# Altium PCB PCB_Step.PcbDoc
Units mm, origin at the board's own origin, x right, y up, seen from the top; angles counter-clockwise.
Board outline 39.75 x 39.5 mm, 2 copper layers (Top Layer, Bottom Layer); 50 components, 50 nets, 210 pads, 84 vias.
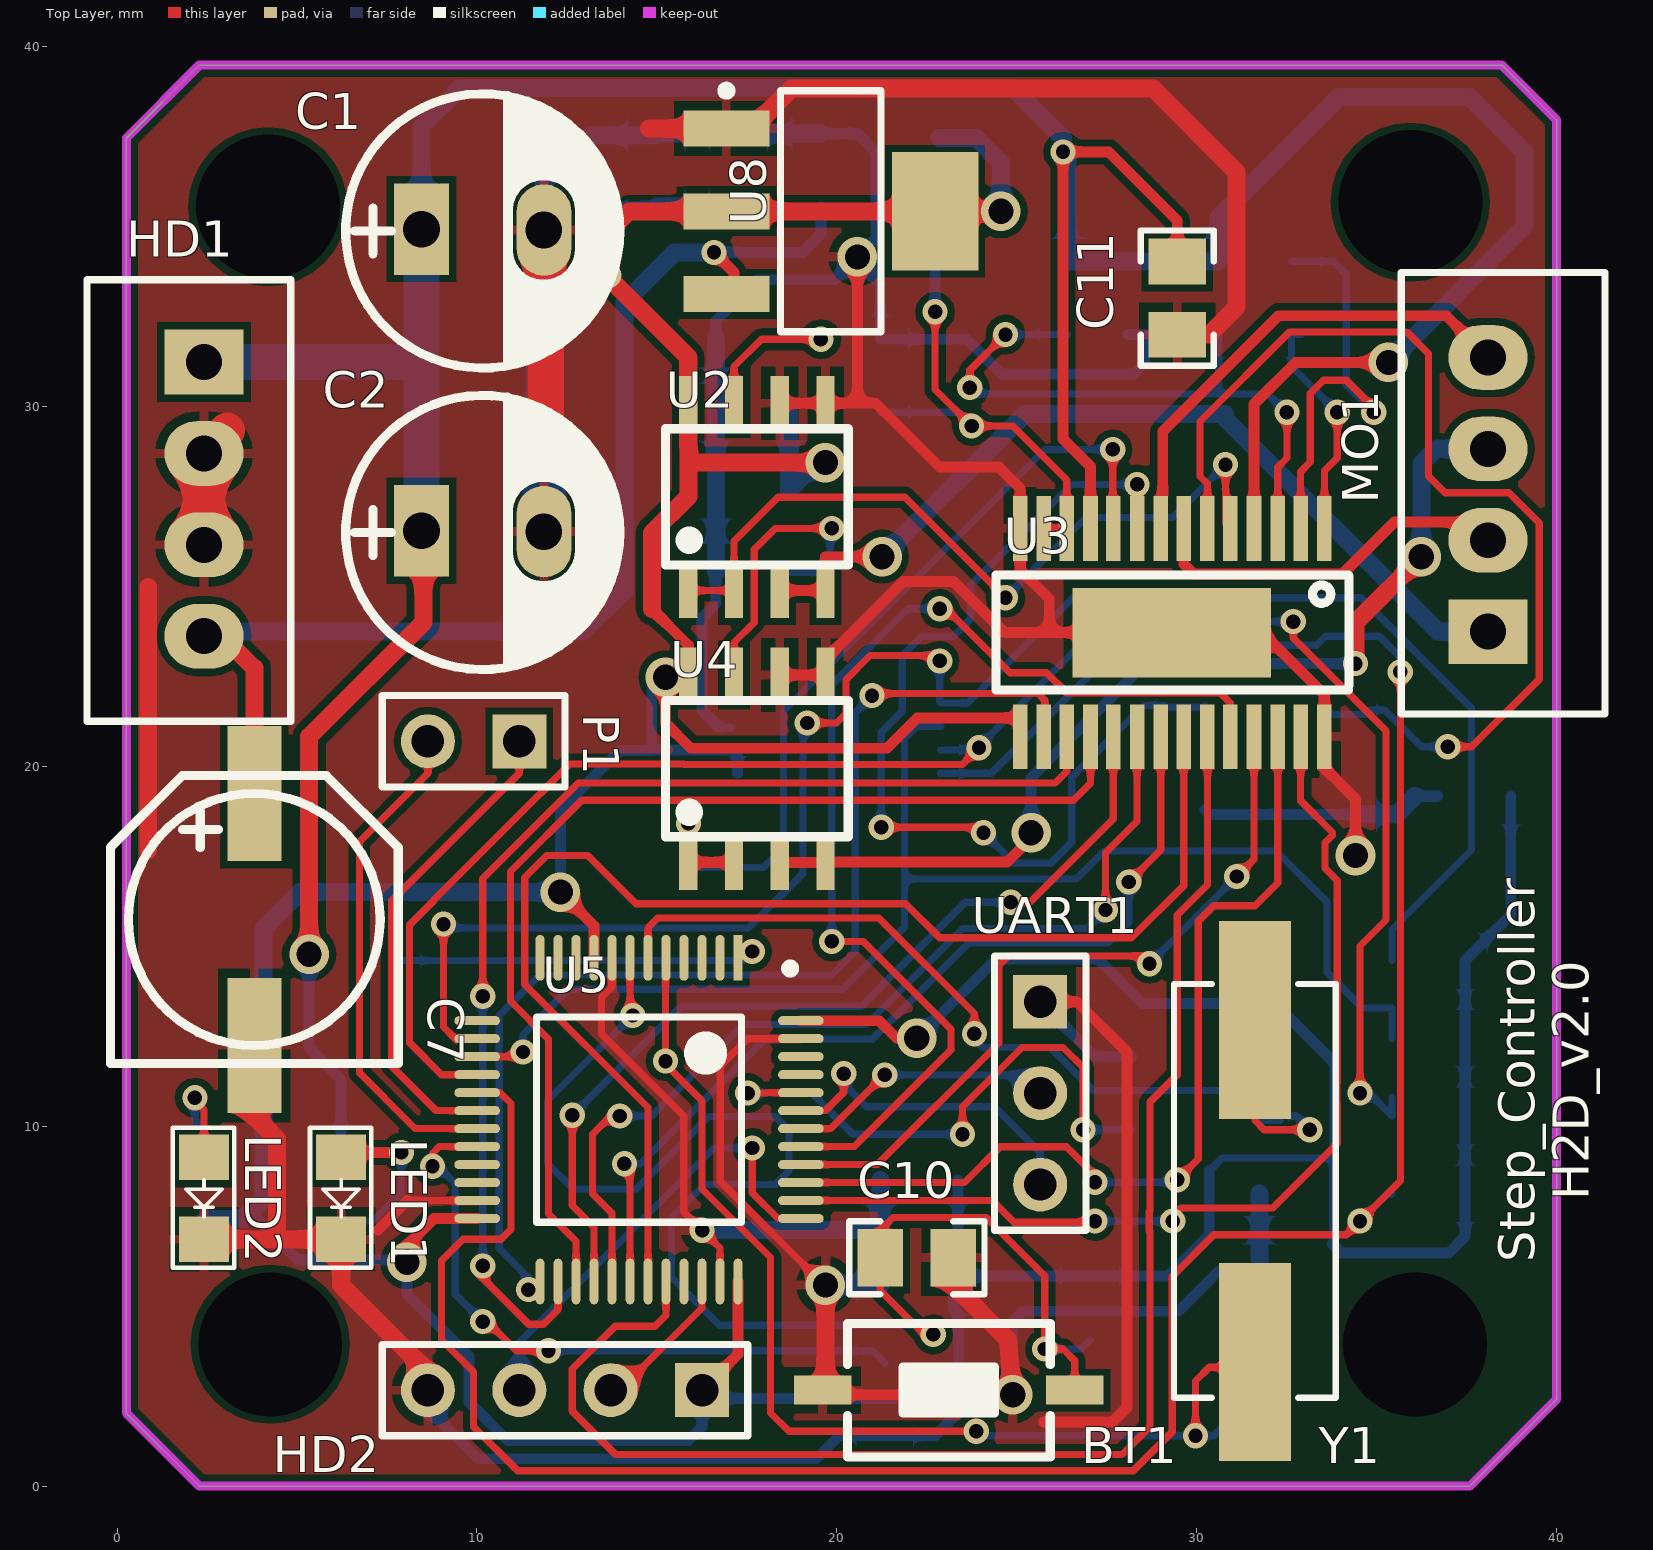
[diagram p0: Top Layer view]
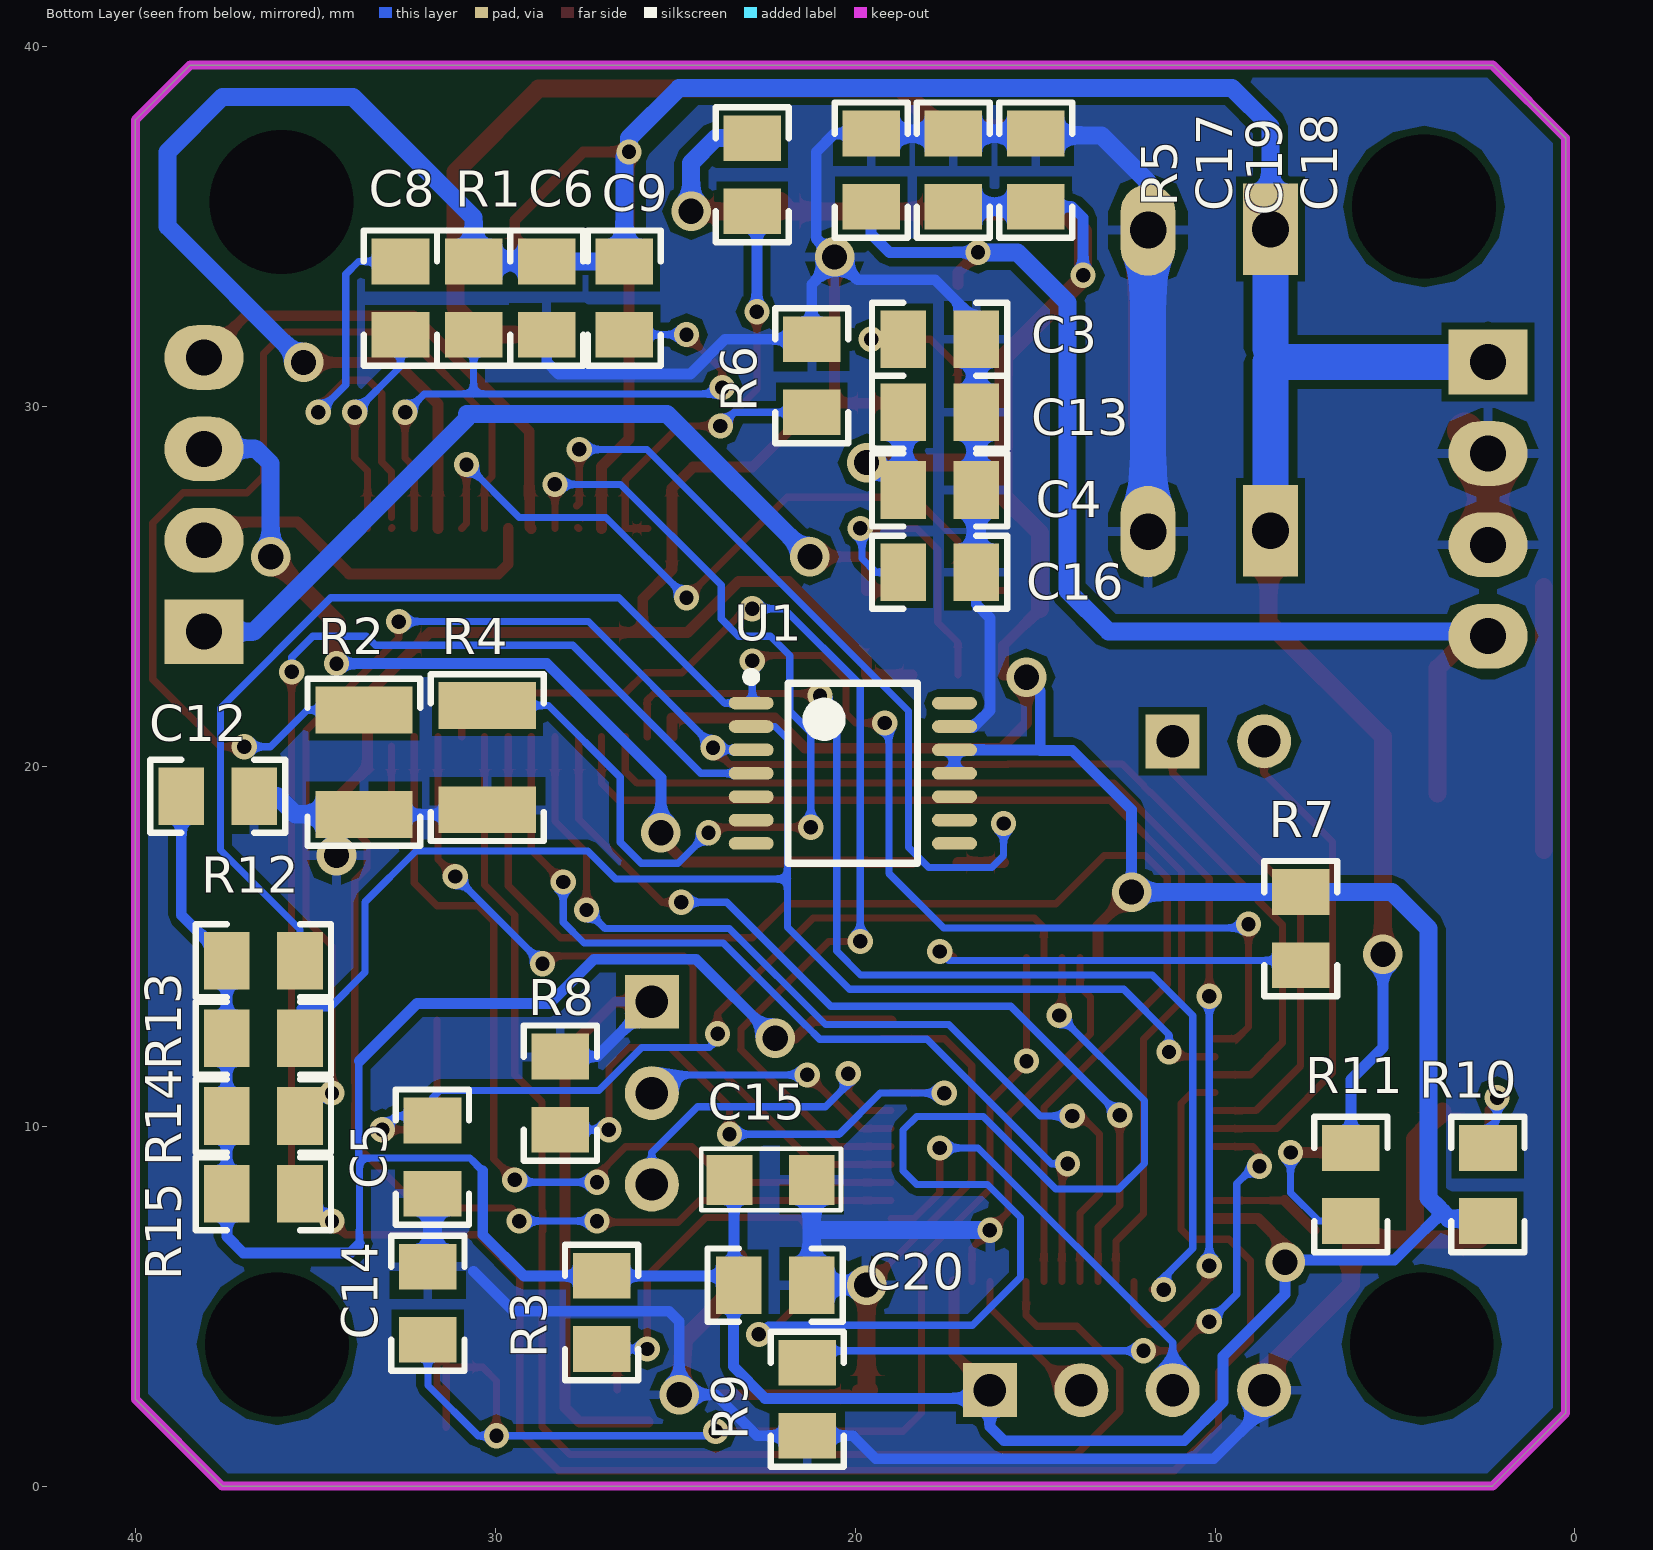
[diagram p1: Bottom Layer view, seen from below]
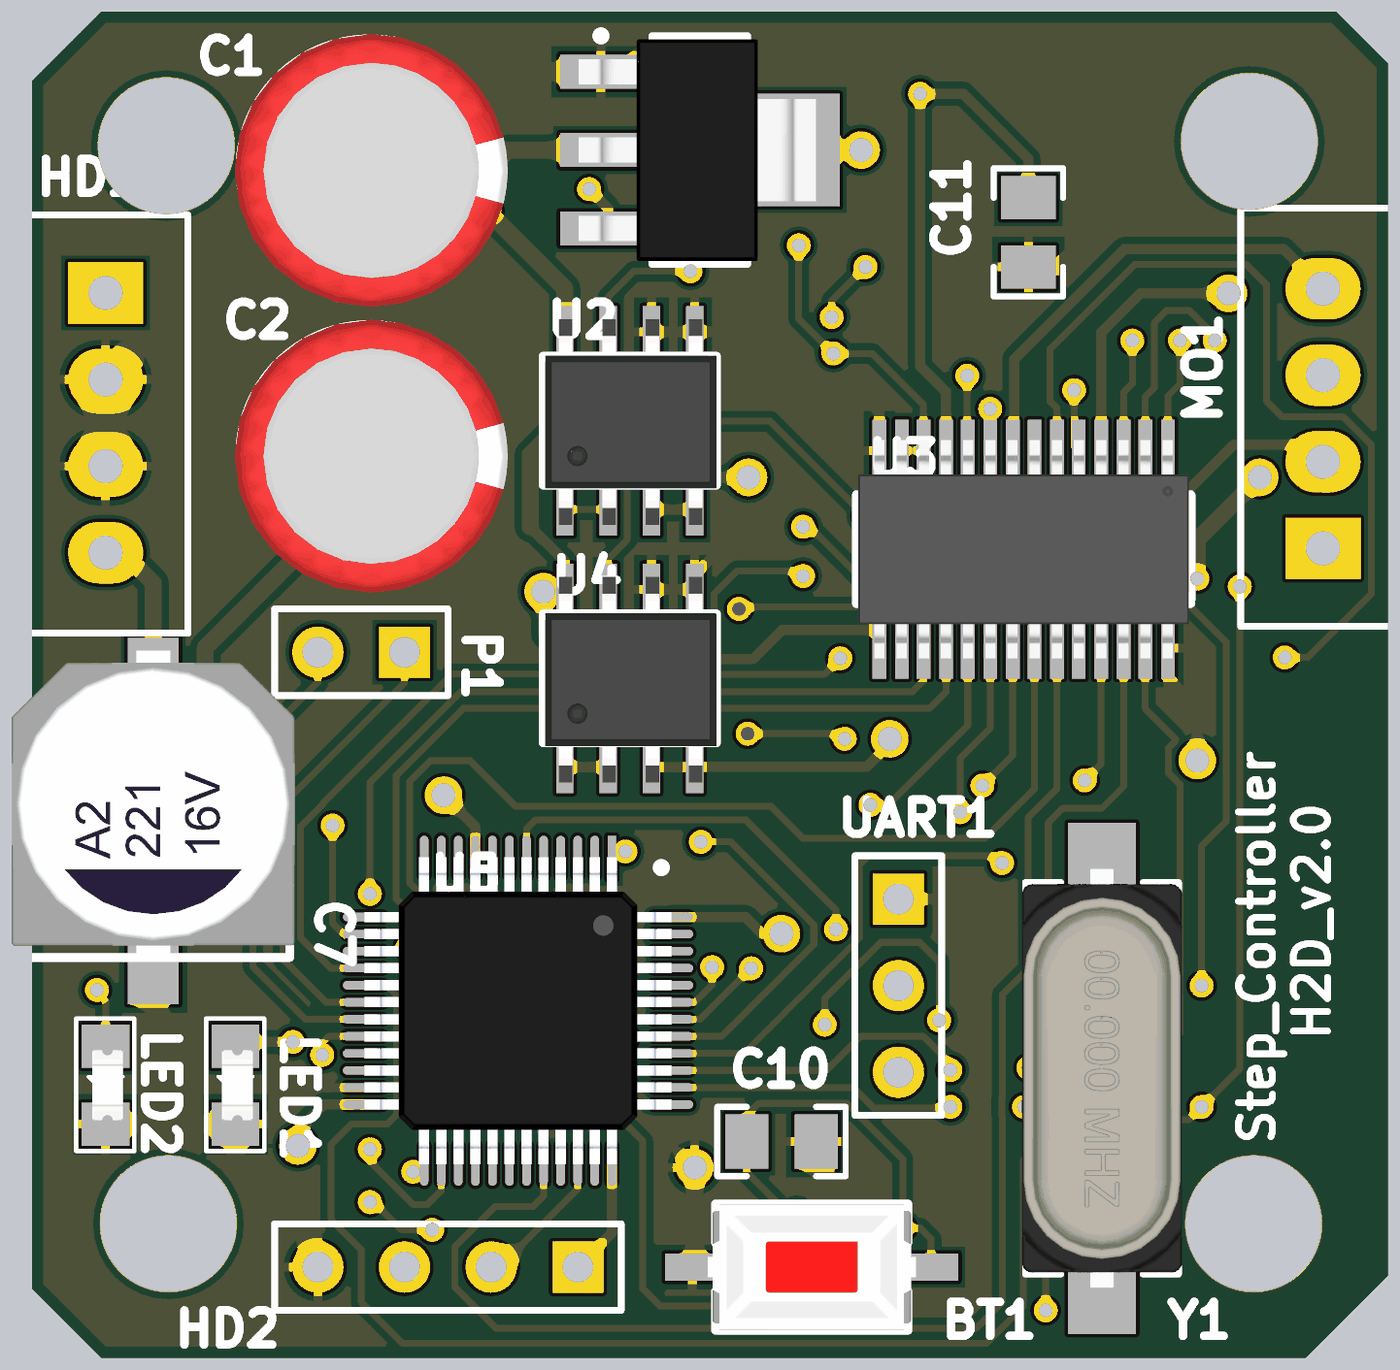
[diagram p2: 3D render of the assembled board from above, using the file's embedded part models]

## Layer stack, top to bottom
Top Solder: solder mask 0.0102, Solder Resist, Dk 3.5
Top Layer: signal copper 0.0356
Dielectric 1: dielectric 0.32, FR-4, Dk 4.8
Bottom Layer: signal copper 0.0356
Bottom Solder: solder mask 0.0102, Solder Resist, Dk 3.5

## Board outline
0.254,2.032 2.286,0 37.592,0 40.005,2.413 40.005,37.973 38.481,39.497 2.286,39.497 0.254,37.465

## Design rules (kind name [scope] priority, off if disabled: settings)
Clearance [All] p1: gap=0.2
PolygonConnect [All] p1: connectstyle=Relief reliefconductorwidth=0.254 reliefentries=4 polygonreliefangle="90 Angle" airgapwidth=0.254
RoutingVias RoutingVias_Power [InNetClass('Power_Class')] p1: holewidth=0.7 width=1.1 viastyle="Through Hole" minholewidth=0.7 minwidth=1.1 maxholewidth=0.7 maxwidth=1.1
RoutingVias RoutingVias_Signal [All] p2: holewidth=0.4 width=0.7 viastyle="Through Hole" minholewidth=0.4 minwidth=0.7 maxholewidth=0.4 maxwidth=0.7
SolderMaskExpansion [All] p1: expansion=0.102
Width Width_Power [InNetClass('Power_Class')] p1: maxlimit=1 minlimit=0.3 preferedwidth=0.5
Width Width_Signal [All] p2: maxlimit=0.2 minlimit=0.2 preferedwidth=0.2
30 further rules are at their usual default settings.

## Classes and differential pairs
net class Power_Class: 3.3V 5V VCC_MO

## Components (designator, comment, footprint, x,y, rotation, side; value= is the part's Value field where it differs from the comment)
BT1 "BUTTON 4P SMD_MH" "BUTTON 2P SMD" 23.114,2.667 r0 top
C1 "390uF" CP1/3.0 10.16,34.925 r0 top
C2 "390uF" CP1/3.0 10.16,26.543 r0 top
C3 "104" 0805_HV 17.653,31.877 r0 bottom
C4 "104" 0805_HV 17.653,27.686 r0 bottom
C5 "22P" 0805_HV 31.75,9.144 r90 bottom
C6 "103" 0805_HV 28.575,33.02 r90 bottom
C7 "330uF" TU_NHOM_220uF_25V_MH 3.81,15.748 r180 top
C8 "103" 0805_HV 32.639,33.02 r270 bottom
C9 "0.1uF" 0805_HV 26.416,33.02 r90 bottom
C10 "104" 0805_HV 22.225,6.35 r180 top
C11 "103" 0805_HV 29.464,33.02 r90 top
C12 "0.47uF" 0805_HV 37.719,19.177 r0 bottom
C13 "104" 0805_HV 17.653,29.845 r0 bottom
C14 "22P" 0805_HV 31.877,5.08 r270 bottom
C15 "104" TU_SMD_0805 22.352,8.509 r0 bottom
C16 "104" 0805_HV 17.653,25.4 r0 bottom
C17 "105" 0805_HV 19.558,36.576 r270 bottom
C18 "105" 0805_HV 14.986,36.576 r270 bottom
C19 "105" 0805_HV 17.272,36.576 r270 bottom
C20 "104" 0805_HV 22.225,5.588 r0 bottom
HD1 "Header 4 Cong_MH" "HEADER 4" 2.413,27.432 r270 top
HD2 "SWD" HDR1X4 16.256,2.667 r180 top
LED1 "Led nguon" LED_0805 2.413,8.001 r270 top
LED2 "Led nguon" LED_0805 6.223,8.001 r270 top
MO1 "Header 4_MH" "HEADER 4" 38.1,27.559 r90 top
P1 "Header 2" HDR1X2 11.176,20.701 r180 top
R1 "1M" 0805_HV 30.607,33.02 r90 bottom
R2 "RT0603DRE07140KL" 1210 33.655,20.119 r270 bottom
R3 "10K" 0805_HV 27.051,4.826 r90 bottom
R4 "RT0603DRE07140KL" 1210 30.226,20.246 r270 bottom
R5 "50K" 0805_HV 22.86,36.449 r90 bottom
R6 "30K" 0805_HV 21.209,30.861 r270 bottom
R7 "0R" 0805_HV 7.62,15.494 r90 bottom
R8 "100K" 0805_HV 28.194,10.922 r270 bottom
R9 "100K" 0805_HV 21.336,2.413 r270 bottom
R10 "330" 0805_HV 2.413,8.382 r270 bottom
R11 "1M" 0805_HV 6.223,8.382 r90 bottom
R12 "4.7K" 0805_HV 36.449,14.605 r0 bottom
R13 "4.7K" 0805_HV 36.449,12.446 r0 bottom
R14 "4.7K" 0805_HV 36.449,10.287 r0 bottom
R15 "4.7K" 0805_HV 36.449,8.128 r0 bottom
U1 "AS5047D" TSSOP14 20.066,19.812 r180 bottom
U2 "ACS722LLCTR-05AB-T" "SOP 8" 17.78,27.495 r0 top
U3 "DRV8841PWPR" TSSOP-28EP 29.324,23.724 r270 top
U4 "ACS722LLCTR-05AB-T" "SOP 8" 17.78,19.939 r0 top
U5 "STM32F103C8T6 LQFP48 _MH" LQFP48 14.478,10.16 r270 top
U8 "AMS1117-3.3V SOT223 _MH" SOT223 19.833,35.433 r270 top
UART1 "Header 3_MH" HDR1X3 25.654,13.462 r270 top
Y1 "8MHZ" "XTAL 49S SMD" 31.623,8.204 r270 top

## Footprints (in the part's own frame and the unit in brackets; to place one, negate y for a bottom-side part, rotate by r counter-clockwise, add the part's x,y. Pads: shape width x height; smd on the part's side, far side on the other; paste and mask are expansions set on the pad)
0805_HV [mil] "0805 with 30mil clearance between pads"
  rect 50x63 smd: 1(-40,0) 2(40,0)
  silkscreen extent -74,-40 74,40, body extent -43,-29 43,29, height 57
1210 [mm] "1210 from SM-752 data"
  rect 1.3x2.7 smd: 1(1.45,0) 2(-1.45,0)
  silkscreen extent -2.32,-1.57 2.32,1.57, body extent -1.7,-1.35 1.7,1.35, height 1.35
"BUTTON 2P SMD" [mm]
  rect 1.6x0.8 smd: 1(-3.5,0) 2(3.5,0)
  silkscreen extent -2.82,-1.85 2.82,1.85, body extent -3.05,-1.85 3.05,1.85, height 2.5
CP1/3.0 [mil]
  rect 60x100 hole 40: 1(-67,0.5)
  oval 60x100 hole 40: 2(67,-0.5)
  silkscreen extent -150,-151 150,148, body extent -156,-161 159,154, height 453
HDR1X2 [mm] "Connector; Header; 2 Position"
  rect 1.5x1.5 hole 0.9: 1(0,0)
  round 1.5 hole 0.9: 2(2.54,0)
  silkscreen extent -1.27,-1.27 3.81,1.27
HDR1X3 [mm] "Connector; Header; 3 Position"
  rect 1.5x1.5 hole 0.9: 1(0,0)
  round 1.5 hole 0.9: 2(2.54,0) 3(5.08,0)
  silkscreen extent -1.27,-1.27 6.35,1.27
HDR1X4 [mm] "Connector; Header; 4 Position"
  rect 1.5x1.5 hole 0.9: 1(0,0)
  round 1.5 hole 0.9: 2(2.54,0) 3(5.08,0) 4(7.62,0)
  silkscreen extent -1.27,-1.27 8.89,1.27
"HEADER 4" [mm]
  rect 1.8x2.2 hole 1: 1(-3.81,0)
  oval 1.8x2.2 hole 1: 2(-1.27,0) 3(1.27,0) 4(3.81,0)
  silkscreen extent -6.1,-3.25 6.17,2.41
LED_0805 [mil]
  rect 50x55 smd: 1(-45,0) 2(45,0)
  silkscreen extent -77,-34 76,33, body extent -41,-16 41,20, height 33
LQFP48 [mm]
  rect 1.27x0.25 smd: 1(-4.524,2.775)
  oval 1.27x0.25 smd: 2(-4.524,2.275) 3(-4.524,1.775) 4(-4.524,1.275) 5(-4.524,0.775) 6(-4.524,0.275) 7(-4.524,-0.225) 8(-4.524,-0.725) 9(-4.524,-1.225) 10(-4.524,-1.725) 11(-4.524,-2.225) 12(-4.524,-2.725) 25(4.473,-2.725) 26(4.473,-2.225) 27(4.473,-1.725) 28(4.473,-1.225) 29(4.473,-0.725) 30(4.473,-0.225) 31(4.473,0.275) 32(4.473,0.775) 33(4.473,1.275) 34(4.473,1.775) 35(4.473,2.275) 36(4.473,2.775)
  oval 0.25x1.27 smd: 13(-2.775,-4.473) 14(-2.275,-4.473) 15(-1.775,-4.473) 16(-1.275,-4.473) 17(-0.775,-4.473) 18(-0.275,-4.473) 19(0.225,-4.473) 20(0.725,-4.473) 21(1.225,-4.473) 22(1.725,-4.473) 23(2.225,-4.473) 24(2.725,-4.473) 37(2.725,4.524) 38(2.225,4.524) 39(1.725,4.524) 40(1.225,4.524) 41(0.725,4.524) 42(0.225,4.524) 43(-0.275,4.524) 44(-0.775,4.524) 45(-1.275,4.524) 46(-1.775,4.524) 47(-2.275,4.524) 48(-2.775,4.524)
  silkscreen extent -4.35,-2.82 2.82,4.35, body extent -4.53,-4.47 4.47,4.53, height 1.5
"SOP 8" [mil] "LQFP64"
  rect 20x60 smd: 1(-75,-102.5) 2(-25,-102.5) 3(25,-102.5) 4(75,-102.5) 5(75,102.5) 6(25,102.5) 7(-25,102.5) 8(-75,102.5)
  silkscreen extent -100,-74 100,74, body extent -98,-120 100,117, height 63
SOT223 [mm]
  rect 1x2.4 smd: 1(-2.3,-2.9) 2(0,-2.9) 3(2.3,-2.9)
  rect 3.3x2.4 smd: 4(0,2.9)
  silkscreen extent -3.47,-3.02 3.35,1.4, body extent -3.25,-3.56 3.25,3.4, height 1.68
TSSOP14 [mm] "TSSOP, 14-Leads, Body 5.00x4.40mm, Pitch 0.65mm, IPC High Density"
  oval 1.25x0.35 smd: 1(-2.825,1.95) 2(-2.825,1.3) 3(-2.825,0.65) 4(-2.825,0) 5(-2.825,-0.65) 6(-2.825,-1.3) 7(-2.825,-1.95) 8(2.825,-1.95) 9(2.825,-1.3) 10(2.825,-0.65) 11(2.825,0) 12(2.825,0.65) 13(2.825,1.3) 14(2.825,1.95)
  silkscreen extent -2.95,-2.5 1.8,2.8, body extent -3.23,-2.55 3.23,2.55, height 1.25
TSSOP-28EP [mil]
  rect 71x16 smd: 1(-114,166.5) 2(-114,140.5) 3(-114,115.5) 4(-114,89.5) 5(-114,63.5) 6(-114,38.5) 7(-114,12.5) 8(-114,-12.5) 9(-114,-38.5) 10(-114,-64.5) 11(-114,-89.5) 12(-114,-115.5) 13(-114,-140.5) 14(-114,-166.5) 15(114,-166.5) 16(114,-140.5) 17(114,-115.5) 18(114,-89.5) 19(114,-64.5) 20(114,-38.5) 21(114,-12.5) 22(114,12.5) 23(114,38.5) 24(114,63.5) 25(114,89.5) 26(114,115.5) 27(114,140.5) 28(114,166.5)
  rect 98x217 smd: 29(0,-0.5)
  silkscreen extent -63,-193 63,194, body extent -126,-191 126,191, height 46
TU_NHOM_220uF_25V_MH [mm]
  rect 1.5x3.75 smd: 1(0,-3.5) 2(0,3.5)
  silkscreen extent -4,-4 4,4, body extent -4.15,-5 4.15,4, height 11.23
TU_SMD_0805 [mil]
  rect 50x55 smd: 1(-45,0) 2(45,0)
  silkscreen extent -77,-34 76,33, body extent -40,-27 40,23, height 24
"XTAL 49S SMD" [mm]
  rect 5.5x2 smd: 1(-4.75,0) 2(4.75,0)
  silkscreen extent -5.75,-2.25 5.75,2.25, body extent -6.15,-2.35 6.15,2.35, height 4.31

## Part data
BT1: "Nút nh?n 4 chân, dán"
C1 C2: library part "Capacitor TuHoa"
C3 C4 C6 C8 C9 C10 C11 C12 C13 C16 C20: library part "Capacitor 0805", "Ceramic Chip Capacitor - Standard"
C5 C14 C17 C18 C19: library part CM, "Cap SMD"
C7: library part TU_NHOM_330uF_16V_MH, "TU_NHOM_330uF_16V_MH"
C15: library part TU_SMD_0805_MH
HD1: "Header 4P XH2.54 cong"
HD2: library part "Header 4_MH", "Header 4P XH2.54 th?ng"
LED1 LED2: library part "LED SMD_0805_MH", "LED 3mm"
MO1: "Header 4P XH2.54 th?ng"
P1: "Header, 2-Pin"
R1 R3 R5 R6 R7 R8 R9 R10 R11 R12 R13 R14 R15: library part "R nho", "RES, 100, 1%, 0.1 W, 0402"
R2 R4: "RES, 140 k, 0.5%, 0.1 W, 0603"
U2 U4: library part ACS712
UART1: "Header 3P XH2.54 th?ng"
Y1: library part "CRYSTAL_49S DIP_MH", "Crystal Oscillator"

## Free pads (board coordinates)
  round 1.524 hole 4: 0(4.191,35.56) 0(4.254,3.937) 0(35.941,35.687) 0(36.068,3.937)

## Via types
v1: diameter 0.7, hole 0.4, Top Layer to Bottom Layer, 69 vias
v2: diameter 1.1, hole 0.7, Top Layer to Bottom Layer, 15 vias

## Nets (pads, with @x,y where several pads share a name; then routed paths per layer and width w, separated by ;. In a path a pad name is that pad's centre, name@x,y a point inside that pad or via, vN(x,y) a via of type N, cw(c..) or ccw(c..) an arc to the next point about the centre after c; other vN are vias at no path point)
3.3V: C4.2 C12.2 C13.2 C15.2 C18.2 C19.2 C20.2 HD2.1 R3.2 R5.2 R7.2 R10.2 R12.2 R13.2 R14.2 R15.2 U1.11 U1.12 U2.8 U3.15 U4.8 U5.9 U5.24 U5.36 U5.48 U8.2 U8.4 | length 174.8
  Top Layer w0.3: v2(8.052,6.223) 8.052,6.68 8.807,7.435 U5.24 ; v2(12.319,16.51) 13.253,15.576 U5.9 ; 14.859,24.384 15.875,23.368 U4.8 15.303,22.543 v2(15.24,22.479) 15.24,21.209 15.94,20.509 21.398,20.509 22.239,21.35 25.095,21.35 U3.15 ; HD2.1 17.253,3.664 U5.36 ; U5.48 21.177,12.935 21.666,12.446 v2(22.225,12.446)
  Top Layer w0.5: 14.859,24.384 14.859,26.492 15.875,27.508 15.875,28.575 ; v2(19.685,28.448) 16.002,28.448 15.875,28.575 ; v2(24.562,35.433) U8.4 22.082,35.433 22.082,35.72 21.795,35.433 U8.2 14.224,35.433 13.665,34.874 v1(13.665,33.655) 13.665,33.579 15.875,31.369 U2.8 15.875,28.575
  Bottom Layer w0.2: 30.353,8.763 30.709,9.119 33.782,9.119 ; 33.782,6.731 33.782,9.119 ; 33.782,11.814 33.797,11.799 33.797,9.134 33.782,9.119
  Bottom Layer w0.3: 3.683,7.62 5.016,6.287 7.988,6.287 v2(8.052,6.223) 8.052,5.334 9.779,3.607 9.779,2.337 10.854,1.262 15.867,1.262 16.256,1.651 HD2.1 16.485,2.438 22.504,2.438 23.386,3.32 23.386,4.793 23.241,4.938 C20.2 C20.2@23.368,5.715 ; v2(12.319,16.51) 12.319,18.796 13.97,20.447 14.859,20.447 14.859,20.462 ; v2@12.556,16.366 v2@12.7,16.51 ; v1(13.665,33.655) 13.665,35.255 13.97,35.56 C18.2 ; v2(15.24,22.479) 14.859,22.098 14.859,20.462 ; U1.11 U1.12 14.859,20.462 ; v2(22.225,12.446) 24.423,14.644 27.259,14.644 28.489,13.414 32.182,13.414 33.782,11.814 ; C20.2@23.368,5.232 C20.2@23.368,5.715 ; C15.2@23.368,8.509 23.368,5.842 C20.2@23.368,5.715 ; C20.2@23.52,5.842 R3.2 29.21,5.842 30.353,6.985 30.353,8.763 ; 33.782,6.731 34.036,6.477 37.008,6.477 37.465,6.934 R15.2 R14.2 R13.2 R12.2 38.735,15.875 C12.2
  Bottom Layer w0.5: R10.2 2.476,7.429 3.492,7.429 3.683,7.62 ; 3.778,7.715 4.064,8.001 4.064,15.494 5.08,16.51 R7.2 v2(12.319,16.51) ; C18.2 C19.2 ; C13.2 C4.2 19.431,28.448 v2(19.685,28.448) ; R5.2 23.876,37.465 24.562,36.779 v2(24.562,35.433) ; C20.2@23.368,5.842 23.444,5.69 C20.2@23.52,5.842
5V: C7.1 C17.2 HD1.4 U8.3 | length 34
  Top Layer w0.3: v1(16.586,34.29) 17.145,33.731 U8.3@17.145,33.401
  Top Layer w0.5: HD1.4@2.413,24.003 HD1.4 2.921,23.622 3.81,22.733 C7.1
  Bottom Layer w0.3: v1(16.586,34.29) 19.05,34.29 19.558,34.798 C17.2
  Bottom Layer w0.5: HD1.4@2.413,24.003 2.667,23.749 12.954,23.749 14.097,24.892 14.097,32.893 15.494,34.29 v1(16.586,34.29)
AI0: U3.24 U5.41 | length 31.3
  Top Layer w0.2: U5.41 20.484,9.435 23.188,12.139 23.175,12.151 23.175,12.698 20.735,15.138 v1(19.863,15.138) ; v1(22.86,24.384) 22.987,24.384 23.012,24.409 24.816,22.606 25.832,22.606 26.391,22.047 30.658,22.047 30.937,21.768 U3.24
  Bottom Layer w0.2: v1(19.863,15.138) 19.863,22.27 21.977,24.384 v1(22.86,24.384)
AI1: U3.25 U5.40 | length 21
  Top Layer w0.2: U5.40 21.127,8.935 24.511,12.319 24.511,14.478 24.765,14.732 28.482,14.732 v1(28.693,14.52) ; v1(31.115,16.942) 31.598,17.424 U3.25
  Bottom Layer w0.2: v1(28.693,14.52) v1(31.115,16.942)
BI1: U3.26 U5.39 | length 25.6
  Top Layer w0.2: U5.39 23.548,8.435 24.545,9.432 26.382,9.432 27.178,8.636 v1(27.178,8.445) ; v1(29.464,8.509) 30.048,9.093 30.048,15.697 30.48,16.129 31.623,16.129 32.258,16.764 U3.26
  Bottom Layer w0.2: v1(27.178,8.445) 29.4,8.445 v1(29.464,8.509)
BI2: U3.27 U5.38 | length 27.8
  Top Layer w0.2: U5.38 24.323,7.935 24.926,7.332 27.144,7.332 v1(27.178,7.366) ; v1(29.337,7.366) 29.337,7.493 29.576,7.732 32.116,7.732 33.909,9.525 33.909,10.638 33.894,10.653 33.894,11.191 33.909,11.206 33.909,16.832 33.567,17.174 33.567,17.88 33.777,18.089 33.777,18.166 32.893,19.05 U3.27@32.893,20.574
  Bottom Layer w0.2: v1(27.178,7.366) v1(29.337,7.366)
BOOT0: R8.2 U5.44 | length 16
  Top Layer w0.2: v1(17.526,10.922) 18.058,10.922 18.071,10.935 U5.44 ; v1(23.495,9.779) 23.495,10.541 25.146,12.192 26.289,12.192 26.848,11.633 v1(26.848,9.906)
  Bottom Layer w0.2: v1(17.526,10.922) 19.304,10.922 20.447,9.779 v1(23.495,9.779) ; v1(26.848,9.906) R8.2
BOOT1: R9.1 U5.20 | length 18.3
  Top Layer w0.2: v1(8.763,8.89) 8.763,9.246 8.953,9.435 U5.20 ; v1(10.16,4.572) 10.287,4.572 11.1,3.759 v1(11.989,3.759)
  Bottom Layer w0.2: v1(8.763,8.89) 8.915,8.89 9.398,8.407 9.398,5.334 v1(10.16,4.572) ; v1(11.989,3.759) 21.006,3.759 R9.1
CLK: R13.1 U1.2 U5.15 | length 37.7
  Top Layer w0.2: U5.15 11.148,11.935 v1(11.278,12.065)
  Bottom Layer w0.2: v1(11.278,12.065) 11.278,12.548 12.539,13.809 20.159,13.809 21.884,15.534 21.884,16.875 ; U1.2 22.23,21.112 21.884,20.767 21.884,16.875 ; R13.1 35.433,13.284 34.62,13.284 33.63,14.275 33.63,16.231 32.207,17.653 27.432,17.653 26.654,16.875 21.884,16.875
CSN: R12.1 U1.1 U5.14 | length 50.6
  Top Layer w0.2: v1(9.068,15.621) 9.068,12.762 9.394,12.435 U5.14 ; v1(19.177,21.209) 19.99,21.209 20.254,21.473 20.254,22.413 20.927,23.086 22.812,23.086 22.911,22.987 v1(22.86,22.936)
  Bottom Layer w0.2: v1(9.068,15.621) 9.017,15.621 9.017,15.51 17.542,15.51 19.065,17.033 19.065,21.209 v1(19.177,21.209) ; v1(22.86,22.936) 22.86,21.813 U1.1@22.911,21.762 ; U1.1 U1.1@22.911,21.762 ; R12.1 35.433,15.469 37.643,17.678 37.643,21.622 34.576,24.689 26.568,24.689 23.642,21.762 U1.1@22.911,21.762
DECAY: U3.19 U5.28 | length 25.6
  Top Layer w0.2: v1(12.649,10.308) 12.649,7.798 13.253,7.194 U5.28 ; v1(24.836,16.225) 25.369,16.225 27.686,18.542 U3.19
  Bottom Layer w0.2: v1(12.649,10.308) 15.676,13.335 20.683,13.335 23.573,16.225 v1(24.836,16.225)
GND: BT1.1 C1.2 C2.2 C3.1 C4.1 C5.1 C6.1 C7.2 C10.1 C11.1 C12.1 C13.1 C14.1 C15.1 C16.1 C17.1 C18.1 C19.1 C20.1 HD1.2 HD1.3 HD2.4 LED1.2 LED2.2 R2.1 R4.1 R6.1 R8.1 R9.2 U1.13 U2.5 U2.6 U3.14 U3.28 U3.29 U4.5 U4.6 U5.8 U5.23 U5.35 U5.47 U8.1 UART1.1 | length 242.8
  Top Layer w0.2: 8.062,7.935 U5.23 ; U5.8 13.753,13.88 13.462,13.589 13.462,12.573 15.748,10.287 15.748,7.62 v1(16.256,7.112) 16.753,6.615 U5.35 ; U5.47@19.256,12.435 U5.47 17.515,12.435 16.764,11.684 16.764,8.47 19.646,5.588 v2(19.685,5.588)
  Top Layer w0.3: 7.239,7.112 8.062,7.935 ; U8.1 U8.1@17.628,37.733 ; U4.6 U4.5 19.685,22.984 21.847,25.146 23.241,25.146 24.663,23.724 25.908,23.724 ; U2.6 U2.5 20.574,30.099 ; BT1.1 BT1.1@19.939,2.667 ; BT1.1@20.193,2.54 v2(24.892,2.54) 24.867,2.667 v2@24.873,2.661 ; v2(20.574,34.163) 20.574,30.099 ; UART1.1 26.67,13.462 28.067,12.065 28.067,2.184 27.661,1.778 25.756,1.778 ; v2(34.417,17.526) 34.417,19.101 33.553,19.964 U3.28 33.553,21.996 31.826,23.724 U3.29 25.908,23.724 ; 20.574,30.099 21.082,30.099 22.86,28.321 24.511,28.321 25.095,27.737 U3.14 25.095,25.476 25.908,24.663 25.908,23.724
  Top Layer w0.5: 0.863,17.679 0.863,24.993 ; LED1.2@2.413,7.112 2.667,6.858 LED2.2 6.223,5.588 8.636,3.175 HD2.4 ; C7.2@3.683,10.414 4.445,9.652 4.445,7.112 ; C1.2 C1.2@11.913,34.861 ; 14.784,37.733 U8.1 ; U8.1@17.628,37.733 18.737,38.843 28.797,38.843 31.115,36.525 31.115,32.766 30.353,32.004 C11.1 ; BT1.1 19.685,2.738 v2(19.685,5.588) ; C10.1 23.241,5.588 24.765,4.064 24.873,2.661 v2(24.892,2.54)
  Top Layer w1: HD1.3@2.413,26.543 HD1.2 HD1.2@3.048,29.337 ; 11.913,29.591 C1.2@11.913,34.861
  Bottom Layer w0.2: U1.13@16.729,21.082 U1.13@17.086,21.082 ; C14.1@31.75,6.223 C14.1
  Bottom Layer w0.3: HD2.4 8.636,2.159 10.033,0.762 19.431,0.762 20.066,1.397 R9.2 22.733,1.397 23.876,2.54 v2(24.892,2.54) ; C16.1 16.637,24.511 16.256,24.13 16.256,21.555 U1.13@16.729,21.082 ; C3.1 16.637,32.385 17.78,33.528 19.939,33.528 v2(20.574,34.163) ; C17.1 20.574,37.592 21.082,37.084 21.082,34.671 v2(20.574,34.163) ; v2@24.511,2.667 v2(24.892,2.54) ; UART1.1 27.178,11.938 R8.1 ; C6.1@28.092,32.004 C6.1 28.575,31.242 28.245,30.912 24.582,30.912 23.617,31.877 R6.1 21.209,33.401 20.574,34.036 v2(20.574,34.163) ; R4.1 30.353,18.669 R2.1 34.417,18.669 v2(34.417,17.526) ; 30.607,5.969 29.495,4.857 25.177,4.857 24.892,4.572 v2(24.892,2.54) ; C12.1@36.068,19.177 C12.1
  Bottom Layer w0.5: C1.2 11.862,36.246 13.157,37.541 14.935,37.541 C18.1 C19.1 C17.1 ; v1(16.256,7.112) 21.133,7.112 21.209,7.036 ; C16.1 C4.1 C13.1 C3.1 ; v2(19.685,5.588) C20.1 21.209,7.036 ; C15.1 21.209,7.036 ; C14.1@31.75,6.223 C5.1 ; R2.1@34.417,18.669 35.56,18.669 C12.1@36.068,19.177
  Bottom Layer w1: C2.2 C1.2
GPIO1: P1.1 U5.18 | length 13.4
  Top Layer w0.2: U5.18 8.869,10.435 7.62,11.684 7.62,16.256 11.176,19.812 P1.1
GPIO2: P1.2 U5.19 | length 13.9
  Top Layer w0.2: P1.2 8.636,19.812 6.731,17.907 6.731,11.486 8.169,10.048 8.281,9.935 U5.19
IA: C3.2 U2.7 | length 3.7
  Top Layer w0.2: U2.7 17.145,31.115 17.907,31.877 v1(19.558,31.877)
IB: C16.2 U4.7 | length 8.8
  Top Layer w0.2: U4.7 17.145,23.444 17.704,24.003 17.704,26.035 18.288,26.619 v1(19.863,26.619)
  Bottom Layer w0.2: C16.2 19.431,25.4 19.812,25.781 v1@19.812,26.619 ; v1(19.863,26.619) v1@19.812,26.619 ; v1@19.812,26.619 19.812,26.772 19.66,26.619 v1@19.812,26.619
MA+: MO1.1 U2.3 U2.4 | length 24.8
  Top Layer w0.3: U2.3 U2.4 19.685,25.832 v2(21.26,25.832)
  Bottom Layer w0.5: v2(21.26,25.832) 25.231,29.803 30.797,29.803 ; 30.797,29.781 30.797,29.666 36.715,23.749 MO1.1
MA-: MO1.2 U3.7 | length 10.7
  Top Layer w0.3: U3.7 29.642,25.629 29.921,25.349 34.069,25.349 ; 34.069,25.367 35.498,26.797 38.1,26.797 MO1.2
MB+: MO1.3 U4.3 U4.4 | length 27.6
  Top Layer w0.3: U4.3 U4.4 19.685,17.348 24.74,17.348 25.4,18.009 v2(25.4,18.161)
  Top Layer w0.5: v1(34.417,22.86) 34.417,24.003 v2(36.246,25.832)
  Bottom Layer w0.3: v2(25.4,18.161) 25.4,19.688 28.572,22.86 v1(34.417,22.86)
  Bottom Layer w0.5: v2(36.246,25.832) 36.246,28.423 36.652,28.829 MO1.3
MB-: MO1.4 U3.8 | length 13.6
  Top Layer w0.3: U3.8 29.046,26.659 29.046,27.457 29.058,27.457 29.058,29.312 32.277,32.531 36.938,32.531 MO1.4
MISO: R14.1 U1.3 U5.16 | length 51
  Top Layer w0.2: U5.16 9.017,11.435 8.128,12.324 8.128,15.6 8.799,16.271 8.799,16.292 11.777,19.27 11.796,19.27 11.972,19.446 11.972,19.465 12.573,20.066 15.747,20.066 15.754,20.059 23.488,20.059 v1(23.952,20.523) ; v1(32.69,24.028) 32.69,23.571 35.267,20.994 35.267,15.734 34.544,15.011 v1(34.544,10.922)
  Bottom Layer w0.2: U1.3 v1@23.851,20.462 ; v1(23.952,20.523) 23.891,20.462 v1@23.851,20.462 ; v1(32.69,24.028) 27.417,24.028 v1@23.851,20.462 ; v1(34.544,10.922) 34.798,10.922 R14.1 R14.1@35.433,10.795
MOSI: R15.1 U1.4 U5.17 | length 74.3
  Top Layer w0.2: U5.17 10.643,10.935 10.947,10.631 10.947,7.137 10.668,6.858 9.612,6.858 9.017,6.263 9.017,4.064 9.906,3.175 9.906,1.651 11.13,0.427 28.24,0.427 29.322,1.509 29.322,5.827 30.48,6.985 34.163,6.985 v1(34.544,7.366) 35.667,8.489 35.667,22.626 v1(35.662,22.631)
  Bottom Layer w0.2: U1.4 24.293,19.812 27.852,23.372 33.331,23.372 33.581,23.622 35.077,23.622 35.662,23.038 v1(35.662,22.631) ; v1(34.544,7.366) 35.306,8.128 R15.1
MOTOR_EN: U3.17 U5.26 | length 33.1
  Top Layer w0.2: v1(10.16,6.121) 10.16,5.777 11.441,4.496 11.847,4.496 12.253,4.902 U5.26 ; v1(10.16,13.614) 10.16,16.891 12.807,19.538 26.066,19.538 26.391,19.863 U3.17
  Bottom Layer w0.2: v1(10.16,6.121) v1(10.16,13.614)
MOTOR_RST: U3.16 U5.25 | length 32.3
  Top Layer w0.2: v1@11.43,5.666 v1(11.43,5.461) U5.25@11.753,5.461 ; v1(20.98,21.971) 21.039,22.03 25.595,22.03 25.781,21.844 U3.16@25.781,20.828
  Bottom Layer w0.2: v1(11.43,5.461) 11.43,5.791 10.617,6.604 10.617,13.081 11.745,14.209 19.853,14.209 20.513,14.869 20.513,21.503 v1(20.98,21.971)
NetC8_1: C8.1 U3.2 | length 11.8
  Top Layer w0.2: U3.2@32.878,26.634 U3.2 ; U3.2@32.893,26.924 32.893,28.194 33.162,28.463 33.162,30.368 33.528,30.734 34.163,30.734 34.925,29.972 v1(34.925,29.845)
  Bottom Layer w0.2: C8.1 33.807,34.036 34.163,33.68 34.163,30.607 v1(34.925,29.845)
NetC8_2: C8.2 U3.1 | length 6.3
  Top Layer w0.2: U3.1 33.553,28.219 33.909,28.575 v1(33.909,29.845)
  Bottom Layer w0.2: C8.2@32.908,32.004 C8.2 32.639,31.115 v1(33.909,29.845)
NetC9_1: C9.1 R1.1 U3.3 | length 18.1
  Top Layer w0.2: v1(23.698,30.531) 23.698,31.013 v1(24.689,32.004) ; U3.3 32.258,28.321 32.512,28.575 v1(32.512,29.845)
  Bottom Layer w0.2: v1(23.698,30.531) 23.876,30.353 30.607,30.353 ; v1(24.689,32.004) C9.1 ; R1.1 30.607,30.353 ; v1@32.41,29.718 32.512,29.616 v1@32.512,29.82 ; v1(32.512,29.845) v1@32.512,29.82 ; 30.607,30.353 31.979,30.353 v1@32.512,29.82
NetLED1_1: LED1.1 R10.1 | length 3.1
  Top Layer w0.2: v1(2.159,10.795) 2.083,10.795 2.413,10.465 LED1.1@2.413,9.398
  Bottom Layer w0.2: v1(2.159,10.795) 2.159,10.185 2.413,9.931 R10.1
NetLED2_1: LED2.1 R11.1 | length 4.8
  Top Layer w0.3: LED2.1@6.223,9.271 v1(7.899,9.271)
  Bottom Layer w0.2: R11.1 7.112,7.366 7.899,8.153 v1(7.899,9.271)
NetR2_2: R2.2 U3.6 | length 29.2
  Top Layer w0.2: U3.6 30.302,27.859 30.099,28.062 30.099,29.591 32.589,32.081 35.839,32.081 36.449,31.471 36.449,28.067 36.906,27.61 38.684,27.61 39.522,26.772 39.522,22.428 37.643,20.549 v1(36.982,20.549)
  Bottom Layer w0.2: R2.2 33.776,21.448 34.686,21.448 34.807,21.569 35.23,21.569 36.25,20.549 v1(36.982,20.549)
NetR4_2: R4.2 U3.9 | length 27.6
  Top Layer w0.2: v1(21.234,18.313) 23.927,18.313 v1(24.079,18.161) ; U3.9 v1(28.346,27.842)
  Bottom Layer w0.2: v1(21.234,18.313) 21.234,20.955 21.819,21.539 21.819,23.089 22.352,23.622 23.241,23.622 23.724,24.105 23.724,25.044 26.521,27.842 v1(28.346,27.842) ; v1(24.079,18.161) 24.929,17.311 25.947,17.311 26.529,17.893 26.529,19.701 28.524,21.696 29.1,21.696 29.148,21.648 30.178,21.648 R4.2
NetR5_1: R5.1 R6.2 U3.12 U3.13 | length 15.1
  Top Layer w0.2: v1(22.733,32.639) 22.733,30.48 v1(23.749,29.464) 24.892,29.464 26.391,27.965 U3.12 U3.13
  Bottom Layer w0.2: R6.2 23.368,29.845 v1(23.749,29.464) v1@23.815,29.464 ; R5.1@22.479,35.941 22.352,35.814 R5.1@22.733,35.433
  Bottom Layer w0.3: v1(22.733,32.639) R5.1@22.733,35.433
NetR7_1: R7.1 U5.1 | length 10.8
  Top Layer w0.2: U5.1 17.429,14.859 v1(17.653,14.859) v1@17.78,14.986
  Bottom Layer w0.2: R7.1@7.62,14.609 17.403,14.609 v1(17.653,14.859)
NetU2_1: U2.1 U2.2 U3.5 | length 21.3
  Top Layer w0.2: U2.1 U2.2 17.145,26.264 18.364,27.483 21.895,27.483 v1(24.689,24.689) ; v1(30.805,28.392) 30.805,26.751 U3.5
  Bottom Layer w0.2: v1(24.689,24.689) 26.924,26.924 29.337,26.924 v1(30.805,28.392)
NetU3_10: U3.10 U4.1 U4.2 | length 22.9
  Top Layer w0: U3.10@27.554,26.801 U3.10@27.686,26.933
  Top Layer w0.2: v1(27.671,28.814) 27.671,27.315 U3.10@27.738,27.248 ; U3.10 U3.10@27.711,26.644
  Top Layer w0.3: U4.1 U4.2
  Bottom Layer w0.2: v1(15.875,18.415) 15.875,17.526 16.205,17.196 17.958,17.196 18.517,17.755 18.517,21.546 25.785,28.814 v1(27.671,28.814)
nFAULT: U3.18 U5.27 | length 30.6
  Top Layer w0.2: U5.27 12.753,6.805 11.989,7.569 11.989,12.421 10.928,13.481 10.928,17.082 12.911,19.065 26.583,19.065 27.051,19.533 U3.18
OSCIN: C14.2 U5.5 Y1.2 | length 35.8
  Top Layer w0.2: U5.5@15.24,14.684 v1(15.24,11.811) 15.24,11.723 16.256,10.707 16.256,8.255 18.161,6.35 18.161,2.032 18.669,1.524 v1(23.876,1.524) ; v1(29.972,1.397) 29.972,2.921 30.353,3.302 31.369,3.302 Y1.2@31.369,2.54 ; Y1.2@31.369,1.626 Y1.2@31.369,2.54 ; Y1.2@31.369,3.556 31.369,3.454 Y1.2 31.623,2.794 Y1.2@31.369,2.54
  Bottom Layer w0.2: v1(23.876,1.524) 24.003,1.397 v1(29.972,1.397) 30.48,1.397 31.877,2.794 C14.2
OSCOUT: C5.2 U5.6 Y1.1 | length 26.9
  Top Layer w0.2: U5.6 14.753,15.515 15.026,15.788 21.169,15.788 23.825,13.132 v1(23.825,12.573) ; Y1.1 31.623,10.16 31.877,9.906 v1(33.147,9.906)
  Bottom Layer w0.2: v1(23.825,12.573) 23.825,12.421 24.054,12.192 25.933,12.192 27.127,10.998 31.547,10.998 31.75,10.795 C5.2 C5.2@32.334,10.16 ; C5.2@32.512,10.287 32.766,10.287 v1(33.147,9.906)
PA0_IN0: U5.10
PA1_IN1: U5.11
PWM_CH1: U3.20 U5.29 | length 26.3
  Top Layer w0.2: U5.29 13.753,7.583 13.208,8.128 13.208,9.78 13.715,10.287 v1(13.97,10.287) ; v1(27.468,16.012) 27.468,17.602 28.346,18.481 U3.20
  Bottom Layer w0.2: v1(13.97,10.287) 14.859,10.287 17.399,12.827 20.828,12.827 23.495,15.494 26.949,15.494 v1(27.468,16.012)
PWM_CH2: U3.21 U5.30 | length 26
  Top Layer w0.2: v1(14.097,8.958) 14.253,9.115 U5.30 ; v1(28.118,16.789) 29.007,17.678 U3.21
  Bottom Layer w0.2: v1(14.097,8.958) 14.546,8.958 18.009,12.421 20.987,12.421 21.365,12.798 21.375,12.798 23.671,15.094 27.54,15.094 28.118,15.672 v1(28.118,16.789)
PWM_CH3: U3.22 U5.31 | length 36.9
  Top Layer w0.2: U5.31 14.753,10.52 11.328,13.945 11.328,16.916 11.938,17.526 13.081,17.526 14.419,16.188 21.912,16.188 22.86,15.24 28.194,15.24 29.642,16.688 U3.22
PWM_CH4: U3.23 U5.32 | length 42.1
  Top Layer w0.2: U5.32 15.253,4.75 14.949,4.445 13.843,4.445 12.649,3.251 12.649,2.083 13.858,0.874 27.925,0.874 28.702,1.651 28.702,7.082 28.687,7.097 28.687,7.635 28.702,7.65 28.702,10.668 29.464,11.43 29.464,15.875 30.302,16.713 U3.23
RST: BT1.2 C10.2 R3.1 U5.7 | length 43.5
  Top Layer w0.2: U5.7 14.253,13.157 v1(14.33,13.081) ; v1(22.682,4.216) 22.428,4.216 21.209,5.436 C10.2 21.209,7.112 21.565,7.468 24.155,7.468 25.781,5.842 v1(25.781,3.81) 26.289,3.81 26.614,3.485 BT1.2
  Bottom Layer w0.2: v1(14.33,13.081) 11.963,10.715 11.963,8.966 12.675,8.255 14.427,8.255 16.444,10.272 18.293,10.272 18.669,9.896 18.669,8.763 18.288,8.382 16.324,8.382 15.406,7.464 15.406,5.803 16.739,4.47 22.428,4.47 v1(22.682,4.216) ; v1(25.781,3.81) 26.797,3.81 R3.1@27.051,4.064
RX: U5.43 UART1.3 | length 9.3
  Top Layer w0.2: U5.43 19.681,10.435 20.193,10.947 v1(20.193,11.464)
  Bottom Layer w0.2: v1(20.193,11.464) 20.193,11.176 20.828,10.541 24.384,10.541 25.654,9.271 UART1.3
SWCLK: HD2.3 U5.37 | length 12.9
  Top Layer w0.2: v1(17.653,9.398) 17.653,8.147 18.364,7.435 U5.37
  Bottom Layer w0.2: HD2.3 11.176,3.988 16.586,9.398 v1(17.653,9.398)
SWDIO: HD2.2 U5.34 | length 4.2
  Top Layer w0.2: HD2.2 13.97,2.667 16.253,4.95 U5.34
TX: U5.42 UART1.2 | length 7.5
  Top Layer w0.2: U5.42 19.835,9.935 21.33,11.43 v1(21.336,11.43)
  Bottom Layer w0.2: v1(21.336,11.43) 25.146,11.43 UART1.2
VCC_MO: C1.1 C2.1 C6.2 C9.2 C11.2 HD1.1 R1.2 R11.2 U3.4 U3.11 | length 105.3
  Top Layer w0.3: U3.11 27.051,28.342 26.289,29.104 v1(26.289,37.084) 27.559,37.084 29.464,35.179 C11.2 ; U3.4 31.598,30.074 32.755,31.231 v2(35.331,31.231)
  Top Layer w0.5: v2(5.334,14.783) 5.334,20.828 8.509,24.003 C2.1@8.509,26.67
  Bottom Layer w0.3: v2(5.334,14.783) 5.334,12.192 6.223,11.303 R11.2
  Bottom Layer w0.5: C1.1 8.458,37.795 9.525,38.862 24.892,38.862 26.289,37.465 v1(26.289,37.084) 26.416,36.957 C9.2 C6.2 R1.2 30.607,35.255 33.96,38.608 37.592,38.608 39.116,37.084 39.116,35.015 v2(35.331,31.231)
  Bottom Layer w1: HD1.1@2.413,31.623 2.794,31.242 8.458,31.242 C2.1 ; 8.458,31.623 C1.1
pads on no net: U1.5 U1.6 U1.7 U1.8 U1.9 U1.10 U1.14 U5.2 U5.3 U5.4 U5.12 U5.13 U5.21 U5.22 U5.33 U5.45 U5.46

## Polygon pours and split planes (outlines as drawn)
GND on Top Layer "Top Layer-No Net" (solid, remove dead copper, pour order 0): 2.349,39.497 38.354,39.497 40.132,37.719 40.132,2.794 39.751,2.413 37.719,0.381 37.719,0.127 2.286,0.127 2.159,0 0.381,1.778 0.381,1.905 0.381,37.338 0.254,37.465 2.286,39.497 2.349,39.497
GND on Bottom Layer "Top Layer-No Net" (solid, remove dead copper, pour order 2): 2.159,39.37 38.1,39.37 38.227,39.497 40.005,37.719 40.005,2.159 37.846,0 37.465,0 2.413,0 0.762,1.651 0.127,1.651 0.127,37.211 0.254,37.338 2.159,39.243 2.159,39.497

## Keep-outs
Keep-Out Layer:
  lines w0.254: 0.254,2.032 2.286,0 37.592,0 40.005,2.413 40.005,37.973 38.481,39.497 2.413,39.497 2.286,39.497 0.254,37.465 0.254,2.032

## Silkscreen, mask and mechanical layers (free items; w line width, h text height)
Top Overlay:
  text "Step_Controller /     H2D_v2.0" at 40.894,6.223 h1 r90